# Altium PCB Main.PcbDoc (part 1 of 2)
Units mm, origin at the board's own origin, x right, y up, seen from the top; angles counter-clockwise.
Board outline 150 x 140 mm, 2 copper layers (Top Layer, Bottom Layer); 87 components, 111 nets, 391 pads, 43 vias.
Unrouted connection lines stored in the file: 32.
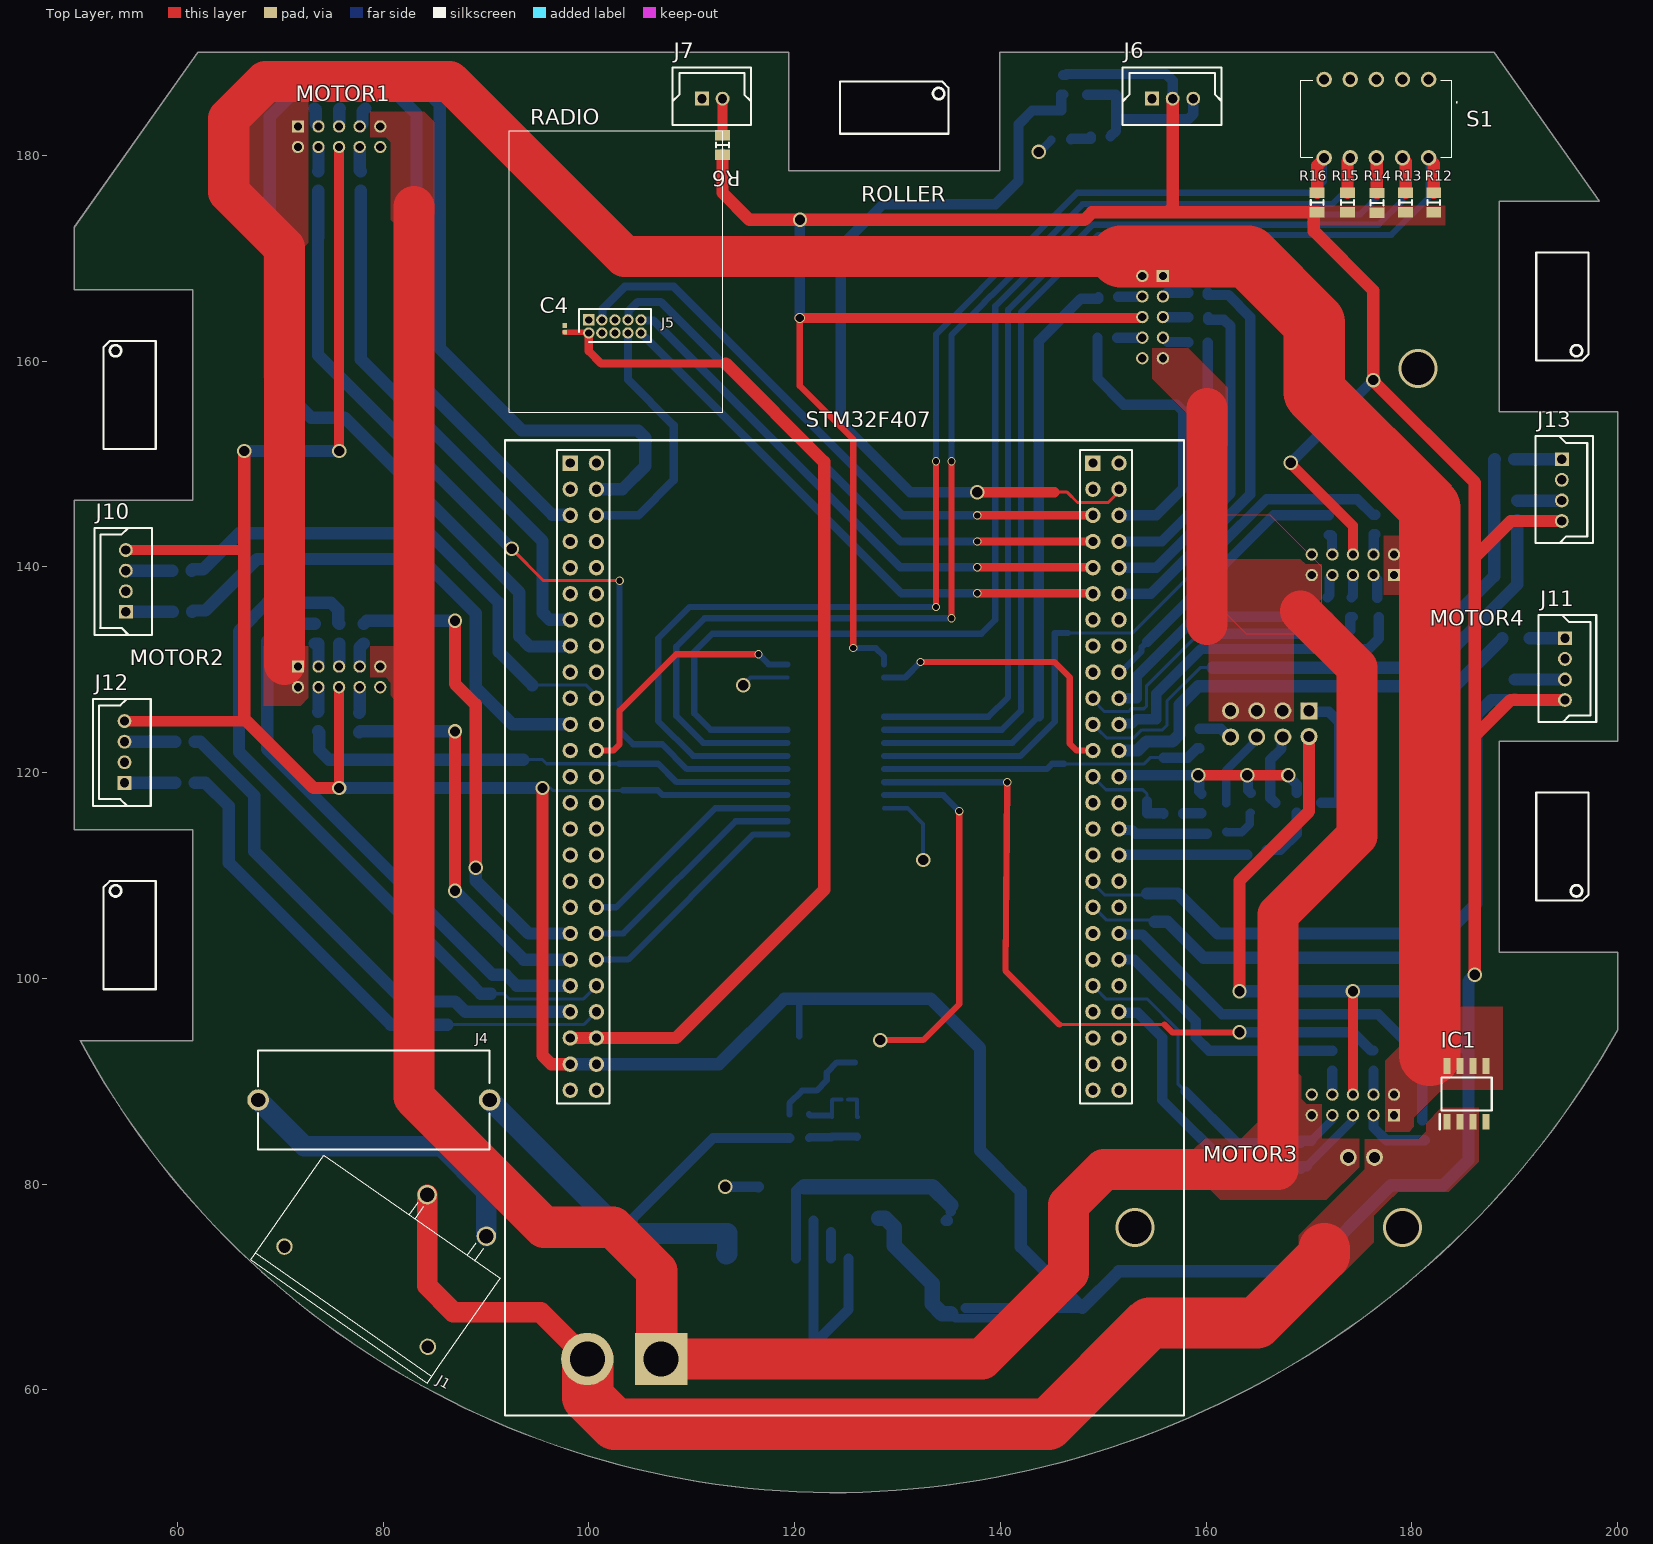
[diagram p0: Top Layer view]
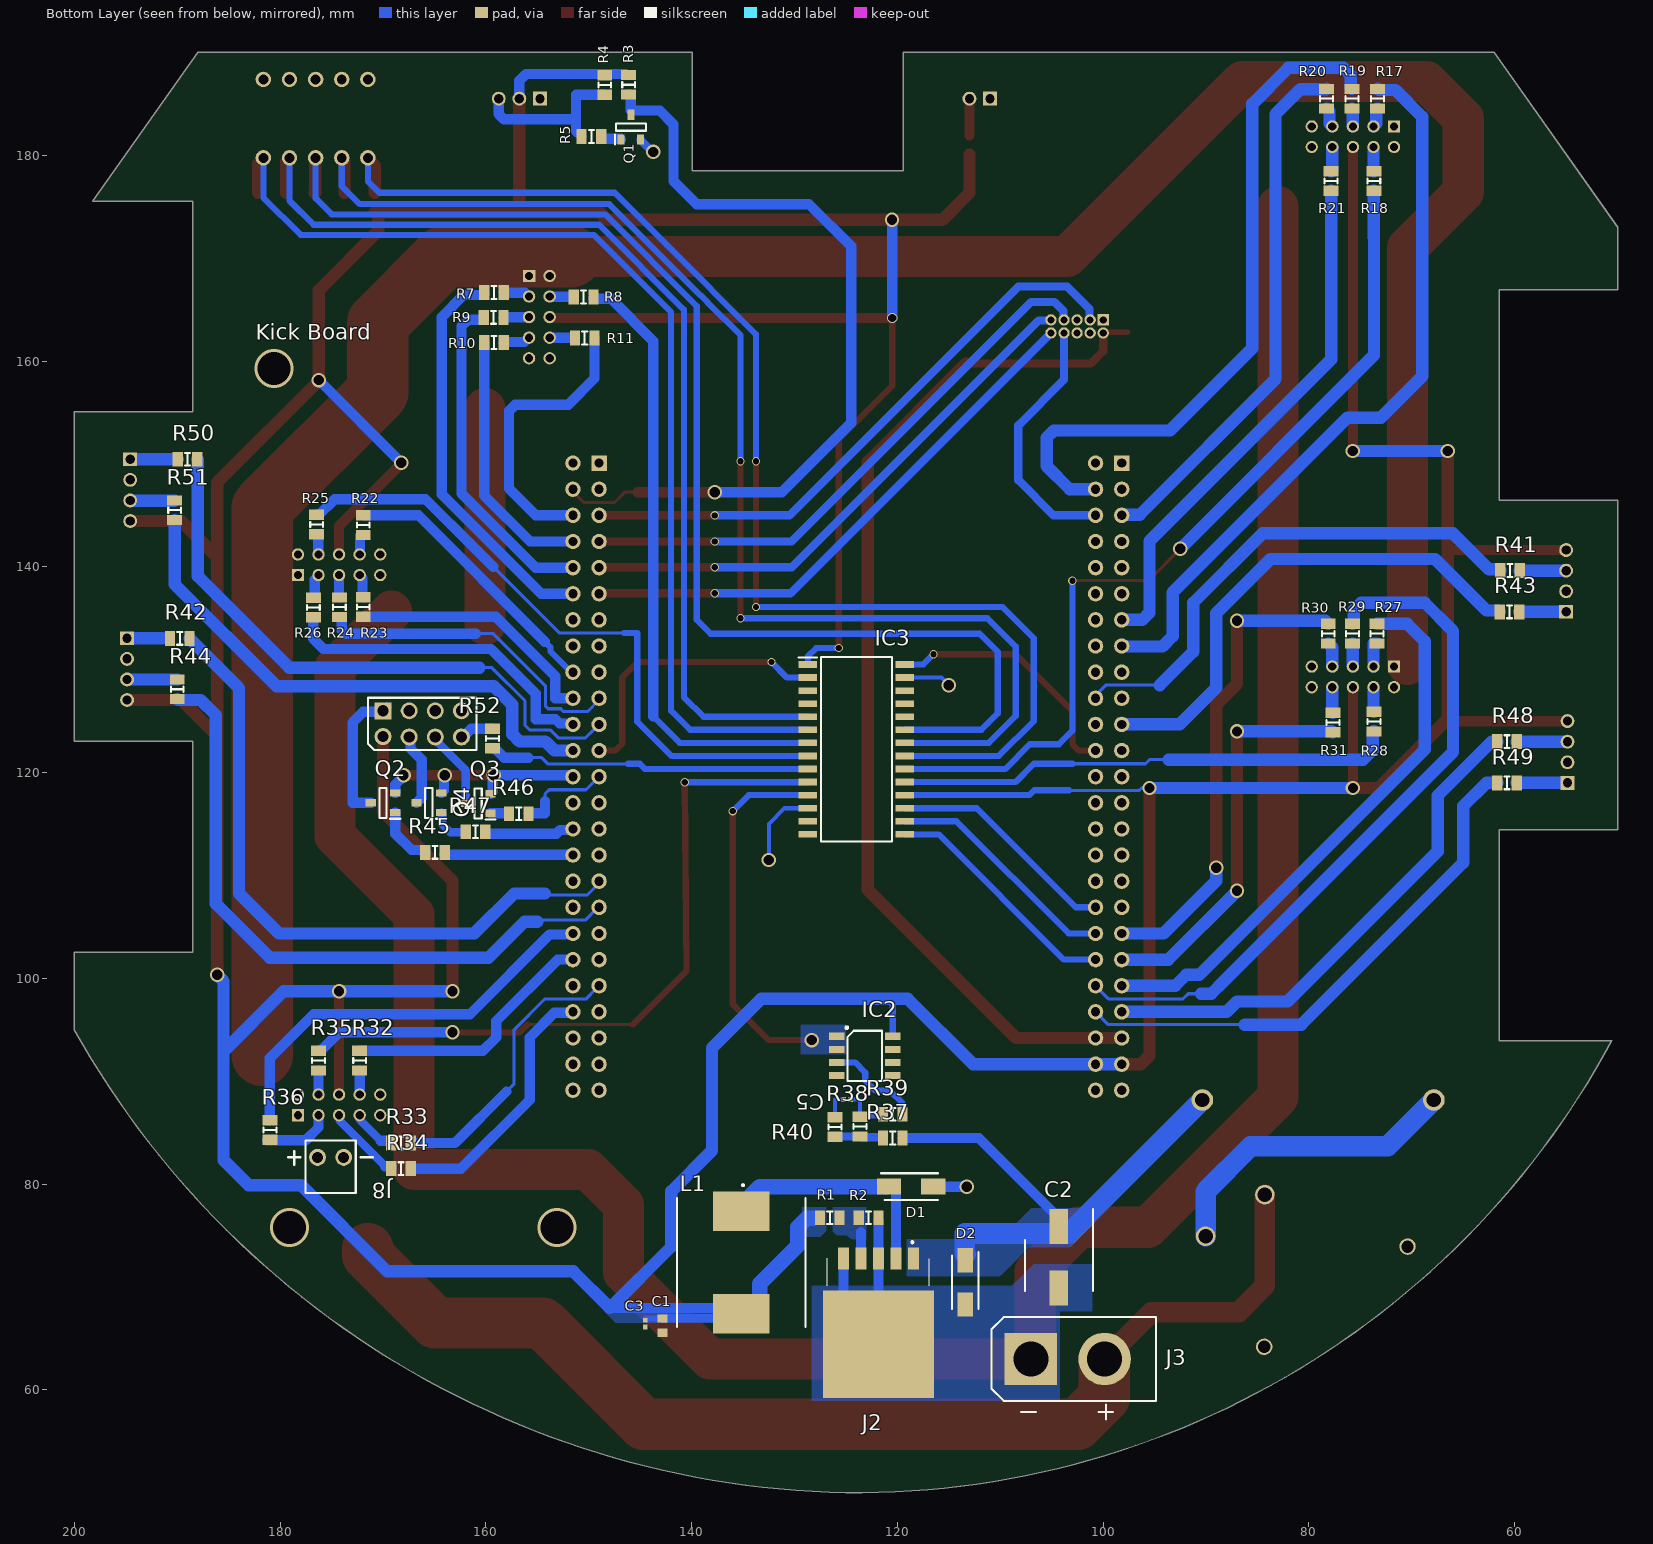
[diagram p1: Bottom Layer view, seen from below]
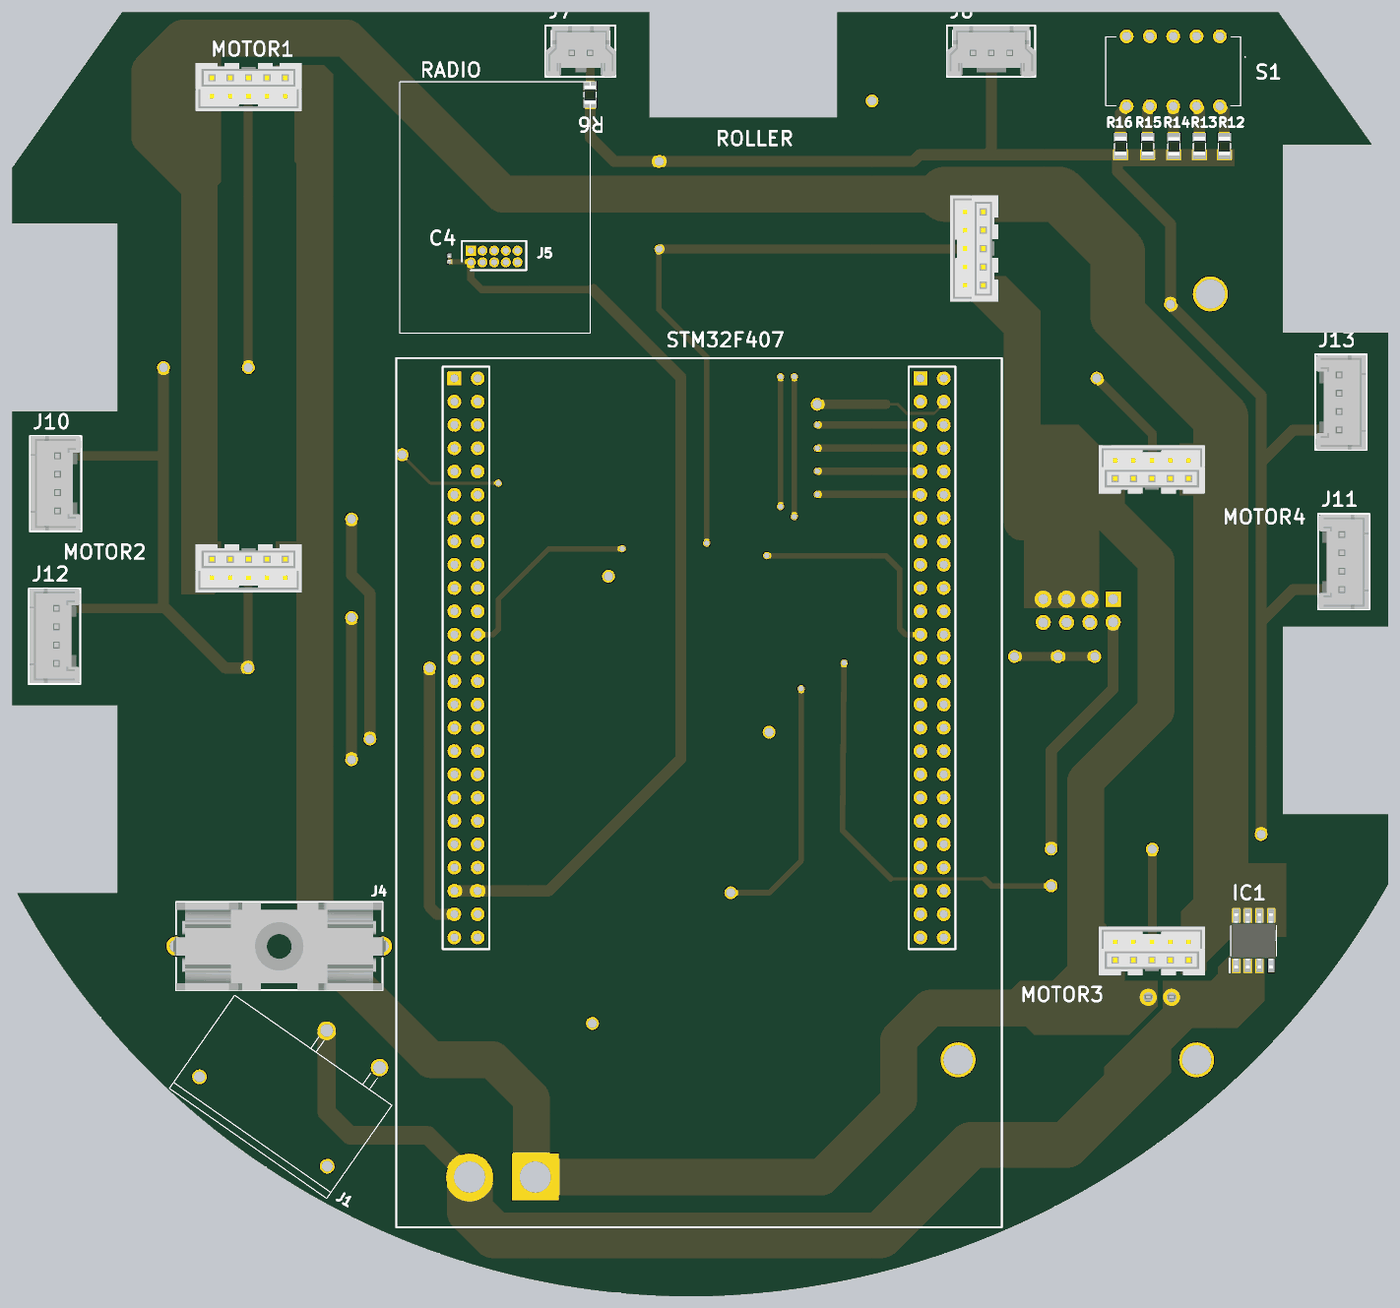
[diagram p2: 3D render of the assembled board from above, using the file's embedded part models]
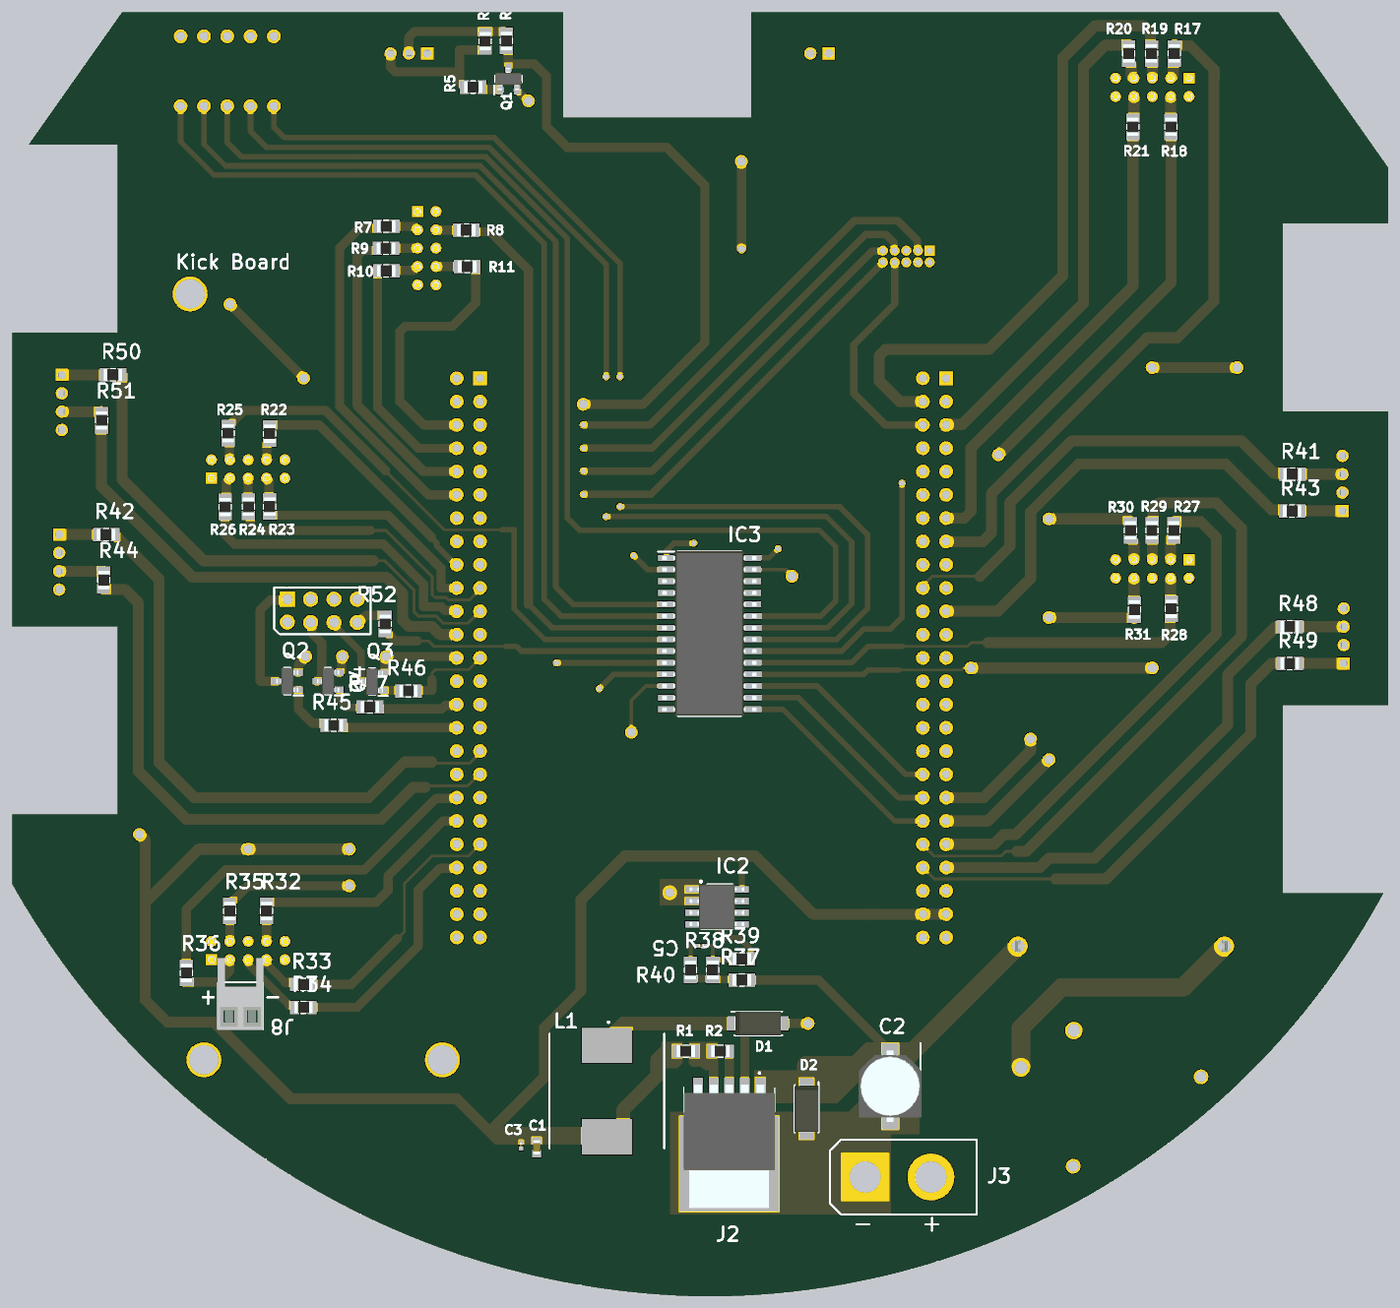
[diagram p3: 3D render of the assembled board from below, using the file's embedded part models]

## Layer stack, top to bottom
Top Solder: solder mask 0.0102, Solder Resist, Dk 3.5
Top Layer: signal copper 0.0356
Dielectric 1: dielectric 0.32, FR-4, Dk 4.8
Bottom Layer: signal copper 0.0356
Bottom Solder: solder mask 0.0102, Solder Resist, Dk 3.5

## Board outline
119.425,190 119.425,178.5 139.925,178.5 139.925,190 188,190 198.2,175.55 188.5,175.55 188.5,155.05 200,155.05 200,123.05 188.5,123.05 188.5,102.55 200,102.55 200,95 cw(c123.232,137.946) 125,50 cw(c124.167,133.611) 50.562,93.94 61.5,93.94 61.5,114.45 50,114.45 50,146.45 61.5,146.45 61.5,166.95 50,166.95 50,173 62,190

## Design rules (kind name [scope] priority, off if disabled: settings)
Clearance [All] p1: gap=0.2 ignorepadtopadclearanceinfootprint=FALSE
ComponentClearance [All] p1 off: gap=0.254 collisioncheckmode=3 verticalgap=0.254 showdistances=FALSE
DiffPairsRouting [All] p1: maxlimit=10 minlimit=0.254 mostfreqgap=0.254 toplayer_minwidth=0.381 toplayer_maxwidth=10 toplayer_prefwidth=0.381 bottomlayer_minwidth=0.381 bottomlayer_maxwidth=10 bottomlayer_prefwidth=0.381 maxuncoupledlength=12.7
Height [All] p1 off: minheight=0 maxheight=25.4 prefheight=12.7
PlaneClearance [All] p1: clearance=0.3
PlaneConnect [All] p1: planeconnectstyle=Direct reliefexpansion=2 reliefentries=2 reliefconductorwidth=2 reliefairgap=2
PolygonConnect [All] p1: connectstyle=Direct reliefconductorwidth=0.254 reliefentries=4 polygonreliefangle="90 Angle" airgapwidth=0.254
RoutingVias [All] p1: holewidth=0.711 width=1.27 viastyle="Through Hole" minholewidth=0.711 minwidth=1.27 maxholewidth=10 maxwidth=10
SolderMaskExpansion [All] p1: expansion=0.102
Width [All] p1: maxlimit=10 minlimit=0.254 preferedwidth=0.254
25 further rules are at their usual default settings.

## Components (designator, comment, footprint, x,y, rotation, side; value= is the part's Value field where it differs from the comment)
C1 "220µF Tantalum" "CAP C2 SMD 6032 (2312)" 142.825,66.25 r270 bottom
C2 "100uF 16V" "C1 CAP ALUM SMD" 104.3,72.9 r270 bottom
C3 "0,1uF" "CAP C3 0603 SMD" 144.525,66.435 r270 bottom
C4 "0,1uF" "CAP C3 0603 SMD" 97.65,163.125 r270 top
C5 "0,1uF" "CAP C3 0603 SMD" 124.887,88.223 r0 bottom
D1 "B340A-13-F" "Diodo D1, D2" 118.675,79.75 r180 bottom
D2 "ES1G" "Diodo D1, D2" 113.411,70.45 r270 bottom
IC1 "IRF9310TRPBF" "Mosfet P_VCC" 185.315,88.762 r90 top
IC2 "LM358AMX" "OP AMP Bateria" 123.175,92.457 r180 bottom
IC3 "DG407DYZ" "MUX 2x 8:1" 124,122.25 r180 bottom
J1 "Botão D502J12S2AHQF" "Botão Bateria Main" 84.284,78.976 r55 top
J2 "Regulador LM2596S" LM2596S50TR 121.85,68.596 r90 bottom
J3 "Conn Bateria PRT-10474" "CONN BATERIA BOLADO" 107.025,63 r180 bottom
J4 "FUSIVEL 0031.8201" "PORTA FUSIVEL" 79.114,88.175 r0 top
J5 "Radio 20021311-00010T4LF" "CONN RADIO" 100,164 r270 top locked
J6 "Sensor Bola" "Conn Receptor Infra" 154.75,185.5 r0 top
J7 "Sensor Bola" "CONN EMISOR INFRA" 111,185.5 r0 top
J8 "Kick 23-0009483026-ND" "BATTERY MAIN TO KICK CONNECTOR" 175.095,85.65 r180 bottom locked
J10 "Encoder" "Conn Encoder" 55,135.625 r90 top
J11 "Encoder" "Conn Encoder" 194.875,133.05 r270 top
J12 "Encoder" "Conn Encoder" 54.875,119 r90 top
J13 "Encoder" "Conn Encoder" 194.575,150.45 r270 top
"Kick Board" "CONN MAIN 2.54mm" "KICK BOARD" 170,126 r180 bottom locked
L1 "33uH" "Indutor DR124-330-R" 135.175,72.375 r270 bottom
MOTOR1 "BLOCO MOTOR Final" "BLOCOMOTOR FINAL" 54,161 r270 top locked
MOTOR2 "BLOCO MOTOR Final" "BLOCOMOTOR FINAL" 54,108.5 r270 top locked
MOTOR3 "BLOCO MOTOR Final" "BLOCOMOTOR FINAL" 196,108.5 r90 top locked
MOTOR4 "BLOCO MOTOR Final" "BLOCOMOTOR FINAL" 196,161 r90 top locked
Q1 "MMBT3904" "Mini Transistor" 145.911,182.73 r90 bottom
Q2 "MMBT3904" "Mini Transistor" 170,117.06 r0 bottom
Q3 "MMBT3904" "Mini Transistor" 160.754,117 r0 bottom
Q4 "MMBT3904" "Mini Transistor" 165.55,117.06 r0 bottom
R1 "4k7" "RES 0805" 126.575,76.725 r0 bottom
R2 "1k5" "RES 0805" 122.8,76.725 r0 bottom
R3 "470R" "RES 0805" 146.125,186.855 r270 bottom
R4 "4K7" "RES 0805" 148.45,186.83 r270 bottom
R5 "10K" "RES 0805" 149.75,181.83 r0 bottom
R6 "Dimensionar!!!!" "RES 0805" 113,181 r270 top
R7 "1K" "RES 0805" 159.225,166.65 r180 bottom
R8 "1K" "RES 0805" 150.5,166.225 r0 bottom
R9 "1K" "RES 0805" 159.25,164.25 r180 bottom
R10 "1K" "RES 0805" 159.225,161.8 r180 bottom
R11 "1K" "RES 0805" 150.4,162.25 r0 bottom
R12 "4K7" "RES 0805" 182.125,175.4 r90 top
R13 "4K7" "RES 0805" 179.4,175.4 r90 top
R14 "4K7" "RES 0805" 176.625,175.375 r90 top
R15 "4K7" "RES 0805" 173.75,175.4 r90 top
R16 "4K7" "RES 0805" 170.8,175.4 r90 top
R17 "1K" "RES 0805" 73.325,185.5 r270 bottom
R18 "1K" "RES 0805" 73.7,177.5 r90 bottom
R19 "1K" "RES 0805" 75.825,185.5 r270 bottom
R20 "1K" "RES 0805" 78.3,185.5 r270 bottom
R21 "1K" "RES 0805" 77.85,177.5 r90 bottom
R22 "1K" "RES 0805" 171.925,144.05 r270 bottom
R23 "1K" "RES 0805" 171.925,136.1 r90 bottom
R24 "1K" "RES 0805" 174.25,136.075 r90 bottom
R25 "1K" "RES 0805" 176.45,144.1 r270 bottom
R26 "1K" "RES 0805" 176.775,136.05 r90 bottom
R27 "1K" "RES 0805" 73.375,133.5 r270 bottom
R28 "1K" "RES 0805" 73.675,124.95 r90 bottom
R29 "1K" "RES 0805" 75.775,133.5 r270 bottom
R30 "1K" "RES 0805" 78.125,133.5 r270 bottom
R31 "1K" "RES 0805" 77.675,124.875 r90 bottom
R32 "1K" "RES 0805" 172.27,92 r270 bottom
R33 "1K" "RES 0805" 168.25,84 r0 bottom
R34 "1K" "RES 0805" 168.25,81.5 r0 bottom
R35 "1K" "RES 0805" 176.275,92 r270 bottom
R36 "1K" "RES 0805" 181,85.25 r270 bottom
R37 "10k" "RES 0805" 120.463,84.481 r180 bottom
R38 "4k7" "RES 0805" 123.637,85.585 r270 bottom
R39 "4k7" "RES 0805" 120.452,86.785 r0 bottom
R40 "1k" "RES 0805" 126.057,85.56 r270 bottom
R41 "300R" "RES 0805" 60.45,139.625 r180 bottom
R42 "300R" "RES 0805" 189.75,133.05 r180 bottom
R43 "300R" "RES 0805" 60.5,135.625 r180 bottom
R44 "300R" "RES 0805" 190,128.1 r270 bottom
R45 "4K7" "RES 0805" 164.95,112.25 r180 bottom
R46 "4K7" "RES 0805" 156.8,116 r180 bottom
R47 "4K7" "RES 0805" 161,114.25 r180 bottom
R48 "300R" "RES 0805" 60.75,123 r180 bottom
R49 "300R" "RES 0805" 60.75,119 r180 bottom
R50 "300R" "RES 0805" 189,150.45 r180 bottom
R51 "300R" "RES 0805" 190.25,145.5 r270 bottom
R52 "1K" "RES 0805" 159.35,123.3 r270 bottom
ROLLER "BLOCO MOTOR Final" "BLOCOMOTOR FINAL" 134,186 r180 top locked
S1 "Dip Switch SPST 5 Position" "Dip Switch SPST 5 Position" 181.63,187.37 r180 top
STM32F407 "STM32F407 DISC" "STM32F407 DISC" 151.54,150.08 r180 top locked

## Footprints (in the part's own frame and the unit in brackets; to place one, negate y for a bottom-side part, rotate by r counter-clockwise, add the part's x,y. Pads: shape width x height; smd on the part's side, far side on the other; paste and mask are expansions set on the pad)
"BATTERY MAIN TO KICK CONNECTOR" [mm] "Da Main até a kick"
  round 1.65 hole 1.07: 1(1.27,-3.05) 2(-1.27,-3.05)
  silkscreen extent -4.09,-6.53 4.09,-1.43, body extent -2.49,-6.6 2.49,1.2, height 8
"BLOCOMOTOR FINAL" [mm]
  rect 1.2x1.2 hole 0.8: 1(-21.802,17.73)
  round 1.2 hole 0.8: 2(-19.802,17.73) 3(-21.802,19.73) 4(-19.802,19.73) 5(-21.802,21.73) 6(-19.802,21.73) 7(-21.802,23.73) 8(-19.802,23.73) 9(-21.802,25.73) 10(-19.802,25.73)
  silkscreen extent -0.95,-1.17 9.56,3.91, body extent -23.49,15.99 -18.21,27.56, height 6.35
"Botão Bateria Main" [mm]
  round 1.9 hole 1.4: 1(0,0) 2(0,-7.04)
  round 1.6 hole 1.2: 3(-12.09,8.46) 3(-12.08,-8.54)
  silkscreen extent -15,-10.5 -1.1,10.42
"C1 CAP ALUM SMD" [mm] "cap um pouco menor"
  rect 3.4x1.8 smd: 1(-3,0) 2(3,0)
  silkscreen extent -4.7,-3.3 3.3,3.3, body extent -3.9,-3.4 3.9,3.4, height 6.1
"CAP C2 SMD 6032 (2312)" [mm] "Package 2312 (6032 Metric)"
  rect 0.78x0.99 smd: 1(-0.7,0) 2(0.7,0)
  body extent -0.8,-0.4 0.8,0.41, height 0.9
"CAP C3 0603 SMD" [mm] "Package 0603 (1608 Metric)"
  rect 0.47x0.44 smd: 1(-0.335,0) 2(0.335,0)
  body extent -0.3,-0.15 0.3,0.15, height 0.33
"CONN BATERIA BOLADO" [mm] "Conn que ja vem com a bateria"
  rect 5.1x5.1 hole 3.4: 1(0,0)
  round 5.1 hole 3.4: 2(7.163,0)
  silkscreen extent -3.83,-5.86 12.15,4.06
"CONN EMISOR INFRA" [mm] "CONN HEADER VERT 2POS 2MM"
  rect 1.35x1.35 hole 0.9: 1(0,0)
  round 1.35 hole 0.9: 2(2,0)
  silkscreen extent -2.88,-2.55 4.75,3.05, body extent -2.85,-2.55 4.85,3, height 8.55
"Conn Encoder" [mm] "CONN HEADER VERT 4POS 2MM"
  rect 1.35x1.35 hole 0.9: 1(0,0)
  round 1.35 hole 0.9: 2(2,0) 3(4,0) 4(6,0)
  silkscreen extent -2.25,-2.55 8.15,3.05, body extent -2.15,-2.55 8.15,3, height 8.55
"CONN RADIO" [mm] "CONN RCPT 1.27 mm 10POS 0.05 GOLD PCB"
  rect 1.1x1.1 hole 0.7: 1(0,0)
  round 1.1 hole 0.7: 2(1.27,0) 3(0,1.27) 4(1.27,1.27) 5(0,2.54) 6(1.27,2.54) 7(0,3.81) 8(1.27,3.81) 9(0,5.08) 10(1.27,5.08)
  silkscreen extent -18.4,-7.75 9,13
"Conn Receptor Infra" [mm] "CONN HEADER VERT 3POS 2MM"
  rect 1.35x1.35 hole 0.9: 1(0,0)
  round 1.35 hole 0.9: 2(2,0) 3(4,0)
  silkscreen extent -2.88,-2.55 6.75,3.05, body extent -2.87,-2.55 6.83,3, height 8.55
"Diodo D1, D2" [mm] "Package DO-214AC, SMA"
  rect 2.35x1.55 smd: 1(-2.15,0) 2(2.15,0)
  silkscreen extent -2.93,-1.3 2.6,1.3, body extent -2.6,-1.3 2.6,1.3, height 2.4
"Dip Switch SPST 5 Position" [mil]
  round 59.09 hole 38: 1(0,0) 2(100,0) 3(200,0) 4(300,0) 5(400,0) 6(0,300) 7(100,300) 8(200,300) 9(300,300) 10(400,300)
  silkscreen extent -110,2 490,298
"Indutor DR124-330-R" [mm] "33uH"
  rect 3.85x5.5 smd: 1(-4.975,0) 2(4.975,0)
  silkscreen extent -7.61,-6.25 6.25,6.25
"KICK BOARD" [mm]
  rect 1.65x1.65 hole 1.1: 1(0,0)
  round 1.65 hole 1.1: 2(0,-2.5) 3(2.54,0) 4(2.54,-2.54) 5(5.08,0) 6(5.08,-2.54) 7(7.62,0) 8(7.62,-2.54)
  silkscreen extent -1.45,-3.81 9.07,1.27
LM2596S50TR [mm]
  rect 2.16x1.07 smd: 1(4.162,-3.4) 2(4.162,-1.7) 3(4.162,0) 4(4.162,1.7) 5(4.162,3.4)
  rect 10.41x10.8 smd: 6(-4.162,0)
  silkscreen extent 1.5,-4.95 5.8,4.95, body extent -8.96,-4.95 4.5,4.96, height 4.75
"Mini Transistor" [mm] "MMBT3904"
  rect 1x0.7 smd: 1(-1.2,0.95) 2(-1.2,-0.95) 3(1.2,0)
  silkscreen extent -1.7,-1.46 0.35,1.55, body extent -1.2,-1.46 1.2,1.46, height 0.93
"Mosfet P_VCC" [mm] "MOSFET P-CH 30V 20A 8-SOIC"
  rect 1.525x0.7 smd: 1(-2.712,1.905) 2(-2.712,0.635) 3(-2.712,-0.635) 4(-2.712,-1.905) 5(2.712,-1.905) 6(2.712,-0.635) 7(2.712,0.635) 8(2.712,1.905)
  silkscreen extent -3.47,-2.45 1.6,2.61, body extent -3,-2.45 3,2.45, height 1.75
"MUX 2x 8:1" [mm] "DG407DYZ"
  rect 1.8x0.65 smd: 1(-4.7,8.255) 2(-4.7,6.985) 3(-4.7,5.715) 4(-4.7,4.445) 5(-4.7,3.175) 6(-4.7,1.905) 7(-4.7,0.635) 8(-4.7,-0.635) 9(-4.7,-1.905) 10(-4.7,-3.175) 11(-4.7,-4.445) 12(-4.7,-5.715) 13(-4.7,-6.985) 14(-4.7,-8.255) 15(4.7,-8.255) 16(4.7,-6.985) 17(4.7,-5.715) 18(4.7,-4.445) 19(4.7,-3.175) 20(4.7,-1.905) 21(4.7,-0.635) 22(4.7,0.635) 23(4.7,1.905) 24(4.7,3.175) 25(4.7,4.445) 26(4.7,5.715) 27(4.7,6.985) 28(4.7,8.255)
  silkscreen extent -5.6,-8.97 3.45,8.97, body extent -5.14,-8.97 5.14,8.97, height 2.64
"OP AMP Bateria" [mm] "Medir nivel da bateria"
  rect 1.525x0.7 smd: 1(-2.712,1.905) 2(-2.712,0.635) 3(-2.712,-0.635) 4(-2.712,-1.905) 5(2.712,-1.905) 6(2.712,-0.635) 7(2.712,0.635) 8(2.712,1.905)
  silkscreen extent -1.85,-2.45 1.68,2.85, body extent -3,-2.45 3,2.45, height 1.75
"PORTA FUSIVEL" [mm] "Fuse Block 10A 500V"
  round 2.1 hole 1.4: 1(-11.25,0) 2(11.25,0)
  silkscreen extent -11.25,-4.8 11.25,4.8, body extent -11.55,-4.83 11.55,4.77, height 11.5
"RES 0805" [mm] "RESC2012X65N"
  rect 1x1.45 smd: 1(-0.95,0) 2(0.95,0)
  silkscreen extent -0.25,-0.63 0.25,0.63, body extent -1,-0.63 1,0.62, height 0.65
"STM32F407 DISC" [mm]
  rect 1.5x1.5 hole 0.9: 1.1(2.54,0) 2.1(53.34,0)
  round 1.5 hole 0.9: 1.2(0,0) 1.3(2.54,2.54) 1.4(0,2.54) 1.5(2.54,5.08) 1.6(0,5.08) 1.7(2.54,7.62) 1.8(0,7.62) 1.9(2.54,10.16) 1.10(0,10.16) 1.11(2.54,12.7) 1.12(0,12.7) 1.13(2.54,15.24) 1.14(0,15.24) 1.15(2.54,17.78) 1.16(0,17.78) 1.17(2.54,20.32) 1.18(0,20.32) 1.19(2.54,22.86) 1.20(0,22.86) 1.21(2.54,25.4) 1.22(0,25.4) 1.23(2.54,27.94) 1.24(0,27.94) 1.25(2.54,30.48) 1.26(0,30.48) 1.27(2.54,33.02) 1.28(0,33.02) 1.29(2.54,35.56) 1.30(0,35.56) 1.31(2.54,38.1) 1.32(0,38.1) 1.33(2.54,40.64) 1.34(0,40.64) 1.35(2.54,43.18) 1.36(0,43.18) 1.37(2.54,45.72) 1.38(0,45.72) 1.39(2.54,48.26) 1.40(0,48.26) 1.41(2.54,50.8) 1.42(0,50.8) 1.43(2.54,53.34) 1.44(0,53.34) 1.45(2.54,55.88) 1.46(0,55.88) 1.47(2.54,58.42) 1.48(0,58.42) 1.49(2.54,60.96) 1.50(0,60.96) 2.2(50.8,0) 2.3(53.34,2.54) 2.4(50.8,2.54) 2.5(53.34,5.08) 2.6(50.8,5.08) 2.7(53.34,7.62) 2.8(50.8,7.62) 2.9(53.34,10.16) 2.10(50.8,10.16) 2.11(53.34,12.7) 2.12(50.8,12.7) 2.13(53.34,15.24) 2.14(50.8,15.24) 2.15(53.34,17.78) 2.16(50.8,17.78) 2.17(53.34,20.32) 2.18(50.8,20.32) 2.19(53.34,22.86) 2.20(50.8,22.86) 2.21(53.34,25.4) 2.22(50.8,25.4) 2.23(53.34,27.94) 2.24(50.8,27.94) 2.25(53.34,30.48) 2.26(50.8,30.48) 2.27(53.34,33.02) 2.28(50.8,33.02) 2.29(53.34,35.56) 2.30(50.8,35.56) 2.31(53.34,38.1) 2.32(50.8,38.1) 2.33(53.34,40.64) 2.34(50.8,40.64) 2.35(53.34,43.18) 2.36(50.8,43.18) 2.37(53.34,45.72) 2.38(50.8,45.72) 2.39(53.34,48.26) 2.40(50.8,48.26) 2.41(53.34,50.8) 2.42(50.8,50.8) 2.43(53.34,53.34) 2.44(50.8,53.34) 2.45(53.34,55.88) 2.46(50.8,55.88) 2.47(53.34,58.42) 2.48(50.8,58.42) 2.49(53.34,60.96) 2.50(50.8,60.96)
  silkscreen extent -6.33,-2.22 59.67,92.56

## Part data
C1: library part "CAP C2 Tantalum", "220µF Molded Tantalum Capacitors 6.3V 2312 (6032 Metric) 125mOhm /  / TPSC227M006R0125 /  / 478-5239-1-ND", Manufacturer_Name=Panasonic, Manufacturer_Part_Number=EEE-FK1E101P, Mouser Part Number=667-EEE-FK1E101P, Allied_Number=70258245, Allied Price/Stock=https://www.alliedelec.com/panasonic-eee-fk1e101p/70258245/, Datasheet Link=https://industrial.panasonic.com/cdbs/www-data/pdf/RDE0000/ABA0000C1181.pdf, Height=6.5mm, Mouser Price/Stock=https://www.mouser.com/Search/Refine.aspx?Keyword=667-EEE-FK1E101P
C2: library part "C1 CAP ALUM 16V EEE-1CA101WP", "100µF 16V Aluminum Electrolytic Capacitors Radial, Can - SMD  1000 Hrs @ 85°C /  / PCE3880CT-ND /  /  EEE-1CA101WP", Manufacturer_Name=Panasonic, Manufacturer_Part_Number=EEE-1CA101WP, Mouser Part Number=667-EEE-1CA101WP, RS Part Number=8077884, Allied_Number=70257932, Allied Price/Stock=https://www.alliedelec.com/panasonic-eee-1ca101wp/70257932/, Datasheet Link=https://industrial.panasonic.com/cdbs/www-data/pdf/RDE0000/ABA0000C1145.pdf, Height=6.1mm, Mouser Price/Stock=https://www.mouser.com/Search/Refine.aspx?Keyword=667-EEE-1CA101WP, RS Price/Stock=https://uk.rs-online.com/web/p/products/8077884
C3 C4 C5: library part "CAP C3 0603", "0.1µF -20%, +80% 50V Ceramic Capacitor Y5V (F) 0603 (1608 Metric) /  / C1608Y5V1H104Z /  / 445-1324-1-ND", Manufacturer_Name=TDK, Manufacturer_Part_Number=C3216C0G1H103J060AA, Mouser Part Number=810-C3216C0G1H103J-1, RS Part Number=7407467P, Datasheet Link=https://product.tdk.com/info/en/catalog/datasheets/mlcc_commercial_midvoltage_en.pdf, Height=0.75mm, Mouser Price/Stock=https://www.mouser.com/Search/Refine.aspx?Keyword=810-C3216C0G1H103J-1, RS Price/Stock=http://uk.rs-online.com/web/p/products/7407467P
D1: library part "Diodo D2 B340A-13-F", "Diode Schottky 40V 3A Surface Mount SMA /  / B340A-FDITR-ND /  / B340A-13-F", Manufacturer_Name="Diodes Inc.", Manufacturer_Part_Number=ES1G, Mouser Part Number=N/A, Datasheet Link=https://www.diodes.com/assets/Datasheets/ds14001.pdf, Height=2.4mm, Mouser Price/Stock=https://www.mouser.com/Search/ProductDetail.aspx?qs=T8kGKSMx1V6viEjwVgaU9A%3d%3d
D2: library part "Diodo D1 ES1G", "Diode Standard 400V 1A Surface Mount SMA (DO-214AC) /  / S1GFSCT-ND", Manufacturer_Name="Diodes Inc.", Mouser Part Number=N/A, Datasheet Link=https://www.diodes.com/assets/Datasheets/ds14001.pdf, Height=2.4mm, Manufacturer_Part_Number=ES1G, Mouser Price/Stock=https://www.mouser.com/Search/ProductDetail.aspx?qs=T8kGKSMx1V6viEjwVgaU9A%3d%3d
IC1: library part "Mosfet P_VCC", "MOSFET P-CH 30V 20A 8-SOIC /  / P-Channel 30V 20A (Tc) 2.5W (Ta) Surface Mount 8-SO /  / IRF9310TRPBF /  / IRF9310TRPBFTR-ND", Manufacturer_Name=Infineon, Manufacturer_Part_Number=IRF9310PBF, Mouser Part Number=942-IRF9310PBF, RS Part Number=7259234P, Allied_Number=70019233, Allied Price/Stock=https://www.alliedelec.com/infineon-irf9310pbf/70019233/, Datasheet Link=http://www.farnell.com/datasheets/2040382.pdf, Height=1.75mm, Mouser Price/Stock=https://www.mouser.com/Search/Refine.aspx?Keyword=942-IRF9310PBF, RS Price/Stock=http://uk.rs-online.com/web/p/products/7259234P
IC2: library part "OP AMP Bateria", "IC OPAMP GP 2 CIRCUIT 8SOIC /  / General Purpose Amplifier 2 Circuit  8-SOIC /  / LM358AMXFSCT-ND /  / LM358AMX", Manufacturer_Name="ON Semiconductor", Mouser Part Number=512-LM358AMX, RS Part Number=7599399P, Datasheet Link=http://docs-emea.rs-online.com/webdocs/10c0/0900766b810c0a50.pdf, Height=1.75mm, Manufacturer_Part_Number=LM358AMX, Mouser Price/Stock=https://www.mouser.com/Search/Refine.aspx?Keyword=512-LM358AMX, RS Price/Stock=http://uk.rs-online.com/web/p/products/7599399P
IC3: library part "MUX 2x 8:1", "IC MULTIPLEXER DUAL 8X1 28SOIC /  / 2 Circuit IC Switch 8:1 100Ohm 28-SOIC /  / DG407DYZ", Manufacturer_Name=Intersil, Mouser Part Number=968-DG407DYZ, Manufacturer_Part_Number=DG407DYZ, Mouser Price/Stock=http://www.mouser.com/Search/ProductDetail.aspx?qs=cbl4%252bYHJGOHwHxaVU1fONg%3d%3d
J1: library part "Botão Bateria Main", "Rocker Switch SPST 10A (AC) 125V Panel Mount, Snap-In, Right Angle /  / D502J12S2AHQF /  / CKN2058-ND", Manufacturer_Name=SCHURTER, Manufacturer_Part_Number=0031.8201, Mouser Part Number=693-0031.8201, RS Part Number=2508764386, Datasheet Link=http://www.schurter.com.hk/var/schurter/storage/ilcatalogue/files/document/datasheet/en/pdf/typ_OGN.pdf, Mouser Price/Stock=https://www.mouser.com/Search/Refine.aspx?Keyword=693-0031.8201, RS Price/Stock=http://uk.rs-online.com/web/p/products/2508764386
J2: library part "Regulador LM2596S 12V - 5V", "Buck Switching Regulator IC Positive Adjustable 1.2V 1 Output 3A TO-263-6, D²Pak (5 Leads + Tab), TO-263BA /  / LM2596S-ADJ", Manufacturer_Name="National Electronics", Manufacturer_Part_Number=LM2596S-5.0/TR, Datasheet Link=https://www.jameco.com/Jameco/Products/ProdDS/895246.pdf, Height=4.65mm
J3: library part "Conn Bateria Bolado", "XT60 CONNECTORS MALE /  / PRT-10474 /  / 1568-1816-ND", Manufacturer_Name=SparkFun, Manufacturer_Part_Number=PRT-10474, Mouser Part Number=474-PRT-10474, Datasheet Link=http://cdn.sparkfun.com/datasheets/Prototyping/xt60.pdf, Height=15.875mm, Mouser Price/Stock=https://www.mouser.com/Search/Refine.aspx?Keyword=474-PRT-10474
J4: library part "PORTA FUSIVEL 0031.8201", "Fuse Block 10A 500V 1 Circuit Cartridge Through Hole /  / 486-1258-ND /  / 0031.8201", Manufacturer_Name=SCHURTER, Manufacturer_Part_Number=0031.8201, Mouser Part Number=693-0031.8201, RS Part Number=2508764386, Datasheet Link=http://www.schurter.com.hk/var/schurter/storage/ilcatalogue/files/document/datasheet/en/pdf/typ_OGN.pdf, Mouser Price/Stock=https://www.mouser.com/Search/Refine.aspx?Keyword=693-0031.8201, RS Price/Stock=http://uk.rs-online.com/web/p/products/2508764386
J5: library part "CONN RADIO", "CONN RCPT 1.27mm 10POS 0.05 GOLD PCB /  / 20021311-00010T4LF /  / 609-3754-ND", Manufacturer_Name=FCI, Manufacturer_Part_Number=20021311-00010T4LF, Mouser Part Number=649-221311-00010T4LF, Datasheet Link=http://portal.fciconnect.com/Comergent//fci/drawing/20021311.pdf, Height=4.6mm, Mouser Price/Stock=https://www.mouser.com/Search/Refine.aspx?Keyword=649-221311-00010T4LF
J6: library part "Conn Receptor Infra", "Connector Header Through Hole 3 position 0.079\" (2.00mm) /  / CONN HEADER VERT 3POS 2MM /  / 0353620350 /  / WM18921-ND", Manufacturer_Name="TE Connectivity", Manufacturer_Part_Number=292161-3, Mouser Part Number=571-292161-3, RS Part Number=6801610, Allied_Number=70083930, Allied Price/Stock=https://www.alliedelec.com/te-connectivity-292161-3/70083930/, Datasheet Link=http://www.te.com/commerce/DocumentDelivery/DDEController?Action=showdoc&DocId=Customer+Drawing%7F292161%7FP1%7Fpdf%7FEnglish%7FENG_CD_292161_P1.pdf%7F292161-3, Height=6.8mm, Mouser Price/Stock=https://www.mouser.com/Search/Refine.aspx?Keyword=571-292161-3, RS Price/Stock=https://uk.rs-online.com/web/p/products/6801610
J7: library part "Conn Emissor Infra", "Connector Header Through Hole 2 position 0.079\" (2.00mm) /  / CONN HEADER VERT 3POS 2MM /  / 0353620350 /  / WM18921-ND", Manufacturer_Name="TE Connectivity", Manufacturer_Part_Number=292161-3, Mouser Part Number=571-292161-3, RS Part Number=6801610, Allied_Number=70083930, Allied Price/Stock=https://www.alliedelec.com/te-connectivity-292161-3/70083930/, Datasheet Link=http://www.te.com/commerce/DocumentDelivery/DDEController?Action=showdoc&DocId=Customer+Drawing%7F292161%7FP1%7Fpdf%7FEnglish%7FENG_CD_292161_P1.pdf%7F292161-3, Height=6.8mm, Mouser Price/Stock=https://www.mouser.com/Search/Refine.aspx?Keyword=571-292161-3, RS Price/Stock=https://uk.rs-online.com/web/p/products/6801610
J8: library part "Battery Main to Kick", "23-0009483026-ND", Manufacturer_Name=Molex, Manufacturer_Part_Number=22-05-3021, Mouser Part Number=538-22-05-3021, RS Part Number=6795448, Allied_Number=70190620, Allied Price/Stock=https://www.alliedelec.com/molex-incorporated-22-05-3021/70190620/, Datasheet Link=http://www.molex.com/webdocs/datasheets/pdf/en-us/0022053031_PCB_HEADERS.pdf, Mouser Price/Stock=https://www.mouser.com/Search/Refine.aspx?Keyword=538-22-05-3021, RS Price/Stock=https://uk.rs-online.com/web/p/products/6795448, System=Connector
J10 J11 J12 J13: library part "Conn Encoder", "Connector Header Through Hole 4 position 0.079\" (2.00mm) /  / CONN HEADER VERT 3POS 2MM /  / 0353620350 /  / WM18921-ND", Manufacturer_Name="TE Connectivity", Manufacturer_Part_Number=292161-3, Mouser Part Number=571-292161-3, RS Part Number=6801610, Allied_Number=70083930, Allied Price/Stock=https://www.alliedelec.com/te-connectivity-292161-3/70083930/, Datasheet Link=http://www.te.com/commerce/DocumentDelivery/DDEController?Action=showdoc&DocId=Customer+Drawing%7F292161%7FP1%7Fpdf%7FEnglish%7FENG_CD_292161_P1.pdf%7F292161-3, Height=6.8mm, Mouser Price/Stock=https://www.mouser.com/Search/Refine.aspx?Keyword=571-292161-3, RS Price/Stock=https://uk.rs-online.com/web/p/products/6801610
"Kick Board": library part "Kick Board", "Connector /  / CONN HEADER VERT 8POS 2.54MM /  / M20-9980445 /  / 952-2122-ND", Manufacturer_Name=FCI, Manufacturer_Part_Number=20021311-00010T4LF, Mouser Part Number=649-221311-00010T4LF, Datasheet Link=http://portal.fciconnect.com/Comergent//fci/drawing/20021311.pdf, Height=4.6mm, Mouser Price/Stock=https://www.mouser.com/Search/Refine.aspx?Keyword=649-221311-00010T4LF, System=Connector
L1: library part "Indutor DR124-221-R", "33µH Shielded Wirewound Inductor 2.6A 97mOhm Max Nonstandard /  / DR124-330-R /  / 513-1435-1-ND", Manufacturer_Name="Cooper Bussmann", Manufacturer_Part_Number=DR124-221-R, RS Part Number=7700915, Datasheet Link=http://www.cooperindustries.com/content/dam/public/bussmann/Electronics/Resources/product-datasheets/Bus_Elx_DS_PM-4141_DR124.pdf, RS Price/Stock=https://uk.rs-online.com/web/p/products/7700915
Q1 Q2 Q3 Q4: library part Mini_Transistor, "Bipolar (BJT) Transistor NPN 40V 200mA 300MHz 350mW Surface Mount SOT-23-3 /  / MMBT3904 /  / MMBT3904FSCT-ND", Manufacturer_Name="ON Semiconductor", Mouser Part Number=512-MMBT3904, RS Part Number=7390303P, Datasheet Link=https://www.fairchildsemi.com/datasheets/MM/MMBT3904.pdf, Height=0.93mm, Manufacturer_Part_Number=MMBT3904, Mouser Price/Stock=https://www.mouser.com/Search/Refine.aspx?Keyword=512-MMBT3904, RS Price/Stock=http://uk.rs-online.com/web/p/products/7390303P
R1 R2 R3 R4 R5 R6 R7 R8 R9 R10 R11 R12 R13 R14 R15 R16 R17 R18 R19 R20 R21 R22 R23 R24 R25 R26 R27 R28 R29 R30 R31 R32 R33 R34 R35 R36 R37 R38 R39 R40 R41 R42 R43 R44 R45 R46 R47 R48 R49 R50 R51 R52: library part "Resistor 0805", "Resistor", Manufacturer_Name="TE Connectivity", Manufacturer_Part_Number=CPF0805B105RE1, Mouser Part Number=279-CPF0805B105RE1, RS Part Number=1239398, Datasheet Link=http://docs-europe.electrocomponents.com/webdocs/13d1/0900766b813d116f.pdf, Height=0.65mm, Mouser Price/Stock=https://www.mouser.com/Search/Refine.aspx?Keyword=279-CPF0805B105RE1, RS Price/Stock=http://uk.rs-online.com/web/p/products/1239398
S1: "CT2065-ND /  / 206-5 /  / Dip Switch SPST 5 Position Through Hole Slide (Standard) Actuator 50mA 24VDC", Manufacturer_Name="TE Connectivity", Manufacturer_Part_Number=1825002-9, RS Part Number=7182102P, Datasheet Link=http://uk.rs-online.com/web/p/products/7182102P, Height=4.81mm, RS Price/Stock=http://uk.rs-online.com/web/p/products/7182102P
MOTOR1 MOTOR2 MOTOR3 MOTOR4 ROLLER: System=Connector

## Via types
v1: diameter 1.4, hole 1, Top Layer to Bottom Layer, 25 vias
v2: diameter 0.8, hole 0.6, Top Layer to Bottom Layer, 14 vias
v3: diameter 3.8, hole 3.2, Top Layer to Bottom Layer, 3 vias
v4: diameter 1, hole 0.8, Top Layer to Bottom Layer, 1 vias

## Nets (pads, with @x,y where several pads share a name; then routed paths per layer and width w, separated by ;. In a path a pad name is that pad's centre, name@x,y a point inside that pad or via, vN(x,y) a via of type N, cw(c..) or ccw(c..) an arc to the next point about the centre after c; other vN are vias at no path point)
3V: C4.2 J5.2 STM32F407.2.45 STM32F407.2.46 | length 103.7
  Top Layer w0.5: C4.2 99.94,162.79 J5.2
  Top Layer w0.8: J5.2 100,160.95 101.2,159.75 113.325,159.75
  Top Layer w1.2: STM32F407.2.45 STM32F407.2.46 108.475,94.2 122.875,108.6 122.875,150.2 113.325,159.75
5V: "Kick Board.2" C1.1 C3.1 IC2.8 IC3.1 IC3.18 J6.2 J10.4 J11.4 J12.4 J13.4 L1.2 MOTOR1.6 MOTOR2.6 MOTOR3.6 MOTOR4.6 R1.2 R3.1 R4.1 R6.2 R12.1 R13.1 R14.1 R15.1 R16.1 ROLLER.6 STM32F407.1.47 STM32F407.1.48 STM32F407.2.29 STM32F407.2.47 STM32F407.2.48 | length 709.6
  Top Layer w0.6: v4(120.5,164.175) 120.5,157.575 125.7,152.375 v2(125.7,132.1)
  Top Layer w1: J12.4 66.25,125 66.5,125.25 ; J10.4 66.078,141.625 ; v1(75.73,118.5) MOTOR2.6 ; MOTOR1.6 75.73,151.27 v1(75.75,151.25) ; v4(120.5,164.175) 153.708,164.175 ROLLER.6 ; v1@120.5,173.7 v1(120.525,173.725) ; v1@168.175,150.08 174.27,143.985 MOTOR4.6 ; MOTOR3.6 v1(174.27,98.75)
  Top Layer w1.2: v1(66.5,151.25) 66.5,125.25 73.25,118.5 v1(75.73,118.5) ; v1(95.5,118.5) 95.5,92.5 96.34,91.66 STM32F407.2.47 ; R6.2 113,176.35 115.625,173.725 v1(120.525,173.725) 148.175,173.725 148.9,174.45 156.25,174.45 ; J6.2 156.75,174.95 156.25,174.45 ; v1(163.25,98.75) 163.25,109.48 170,116.23 170,123.5 ; R16.1 R16.1@170.775,174.45 ; v1@176.2,158.1 186.125,148.175 186.125,140.95 ; v1(176.25,158.15) 176.25,166.85 170.475,172.625 170.475,174.125 170.675,174.325 170.675,174.35 R16.1@170.775,174.45 ; v1(186.125,100.35) 186.125,123.575 ; J13.4 189.625,144.45 186.125,140.95 ; J11.4 189.6,127.05 186.125,123.575 ; 156.25,174.45 R16.1@170.775,174.45 ; 186.125,123.575 186.125,140.95
  Bottom Layer w0.3: v1(95.5,118.5) 96.275,118.5 96.5,118.275 103.325,118.275
  Bottom Layer w0.6: 103.325,118.275 106.7,118.275 107.17,117.805 IC3.18 ; IC2.8 120.463,98.003 ; v2(125.7,132.1) 127.9,132.1 128.7,131.3 IC3.1 ; 130.802,97.805 131,98.003 ; C1.1 C3.1@144.5,66.95
  Bottom Layer w0.8: L1.2 135.625,66.95 C1.1
  Bottom Layer w1: v4(120.5,164.175) v1@120.5,173.7 ; L1.2@136.65,67.95 147.95,67.95 ; R3.1 146.35,187.805 146.438,187.893 156.107,187.893 156.75,187.25 J6.2 ; v1@168.175,150.08 v1@176.2,158.105
  Bottom Layer w1.2: v1(66.5,151.25) v1(75.75,151.25) ; v1(75.73,118.5) v1(95.5,118.5) ; STM32F407.2.47 STM32F407.2.48 112.66,91.66 119.003,98.003 120.463,98.003 131,98.003 133.247,98.003 138.025,93.225 138.025,83.25 141.987,79.288 141.987,73.913 147.95,67.95 151.525,71.525 169.6,71.525 177.975,79.9 183.075,79.9 185.5,82.325 185.5,92.9 ; v1(163.25,98.75) v1(174.27,98.75) 179.65,98.75 185.5,92.9 ; v1(186.125,100.35) 185.5,99.725 185.5,92.9
  Bottom Layer w1.5: 128.175,76.7 128.796,76.7 129.675,75.821 129.675,74.025 133.375,70.325 133.375,68.375 134.35,67.4 L1.2
  other v1: 168.225,150.1
12V: C2.1 D2.1 J2.1 J4.2 R37.2 | length 49.8
  Bottom Layer w1: C2.1 104.3,76.7 112.081,84.481 R37.2
  Bottom Layer w2: J4.2 103.339,75.2 113.45,75.2 113.45,73.25 D2.1@113.375,73.175
A0: IC3.17 STM32F407.2.36 | length 22.6
  Bottom Layer w0.6: STM32F407.2.36 102.65,106.9 112.285,116.535 IC3.17
A1: IC3.16 STM32F407.2.38 | length 23.1
  Bottom Layer w0.6: STM32F407.2.38 103.36,104.36 114.265,115.265 IC3.16
A2: IC3.15 STM32F407.2.40 | length 23.6
  Bottom Layer w0.6: STM32F407.2.40 103.82,101.82 115.995,113.995 IC3.15
Bateria: IC2.1 IC2.2 IC3.11 | length 35.8
  Top Layer w0.6: v1(128.325,94) 132.5,94 136,97.5 v2(136,116.25)
  Bottom Layer w0.6: IC3.11 134.445,117.805 v2(136,116.25)
BRK_M1: R20.1 STM32F407.2.5 | length 52.2
  Bottom Layer w1.2: R20.1 78.325,186.425 80.825,186.425 83.25,184 83.25,158.25 96.443,145.057 98.143,145.057 STM32F407.2.5
BRK_M2: R30.1 STM32F407.2.37 | length 46.4
  Top Layer w1.2: v1(87,134.75) 87,128.625 89,126.625 v1(89,110.75)
  Bottom Layer w1.2: R30.1 78.425,134.75 v1(87,134.75) ; v1(89,110.75) 89,109.5 94.14,104.36 STM32F407.2.37
BRK_M3: R33.1 STM32F407.1.41 | length 27.7
  Bottom Layer w0.3: STM32F407.1.41 149.849,98.431 149.849,98.401 150.25,98 154.25,98 157.25,95 157.25,89.75 158,89
  Bottom Layer w1: 158,89 163,84 R33.1
BRK_M4: R23.1 STM32F407.1.20 | length 24.9
  Bottom Layer w1: STM32F407.1.20 153.25,127.22 153.25,129.375 159.025,135.15 R23.1
BRK_MR: R10.1 STM32F407.1.8 | length 25.4
  Bottom Layer w1: STM32F407.1.8 155.71,142.46 160.175,146.925 R10.1
Chip_Kick: R45.2 STM32F407.1.32 | length 12.5
  Bottom Layer w1: STM32F407.1.32 151.56,112 R45.2@164,112
DIR_M1: R19.1 STM32F407.2.4 | length 68.5
  Bottom Layer w1.2: R19.1 75.85,186.45 75.95,186.55 75.95,187.797 76.653,188.5 82,188.5 85.5,185 85.5,161.25 93.5,153.25 104.797,153.25 105.5,152.547 105.5,149.79 103.25,147.54 STM32F407.2.4
DIR_M2: R29.1 STM32F407.2.42 | length 69.5
  Bottom Layer w0.3: 90.5,98.5 91.75,98.5 92.25,98 99.5,98 100.74,99.24 STM32F407.2.42
  Bottom Layer w1.2: R29.1 75.75,134.45 75.65,134.55 75.65,135.797 74.947,136.5 68.75,136.5 66,133.75 66,122 88.25,99.75 89.5,98.5 90.5,98.5
DIR_M3: R34.1 STM32F407.1.44 | length 25.6
  Bottom Layer w1: STM32F407.1.44 151.636,96.644 153.356,96.644 155.75,94.25 155.75,88.175 162.425,81.5 R34.1
DIR_M4: R24.1 STM32F407.1.19 | length 31.6
  Bottom Layer w0.3: STM32F407.1.19 149,127.05 150.125,125.925 152.45,125.925 152.725,126.2 153.949,126.2 154.225,126.476 154.225,128.45 159.275,133.5 160.975,133.5
  Bottom Layer w1: 160.975,133.5 173.689,133.5 174.025,133.836 174.025,135.125 R24.1
DIR_MR: R9.1 STM32F407.1.10 | length 32.7
  Bottom Layer w1: STM32F407.1.10 155.17,139.92 162.38,147.13 162.38,163.38 161.735,164.025 160.2,164.025 R9.1
EN_M1: R17.1 STM32F407.2.15 | length 73.3
  Bottom Layer w1.2: R17.1 73.225,186.35 71.6,186.35 68.997,183.747 68.997,182.753 69,182.75 69,158.5 73,154.5 76.25,154.5 93.25,137.5 93.25,133.25 94.25,132.25 98.15,132.25 STM32F407.2.15
EN_M2: R27.1 STM32F407.2.41 | length 54.8
  Bottom Layer w1.2: R27.1 70.45,134.45 68.75,132.75 68.75,122.25 90.65,100.35 91.93,100.35 93,99.28 STM32F407.2.41
EN_M3: R36.1 STM32F407.1.38 | length 40.5
  Bottom Layer w1: STM32F407.1.38 151.636,104.264 153.786,104.264 161.55,96.5 176.75,96.5 181,92.25 R36.1
EN_M4: R26.1 STM32F407.1.22 | length 32.2
  Bottom Layer w1: STM32F407.1.22 151.636,124.776 152.851,124.776 153.25,125.175 155.15,125.175 155.15,127.65 159.5,132 175.75,132 176.775,133.025 R26.1
EN_MR: R7.1 STM32F407.1.12 | length 39.2
  Bottom Layer w1: STM32F407.1.12 154.63,137.38 164.3,147.05 164.3,164.275 162.15,166.425 160.175,166.425 R7.1
Encoder_1A: R43.1 STM32F407.2.21 | length 49.8
  Bottom Layer w1.2: R43.1 61.45,135.65 61.55,135.75 62.75,135.75 67.75,140.75 83.75,140.75 89,135.5 89,128.25 92.57,124.68 STM32F407.2.21
Encoder_1B: R41.1 STM32F407.2.20 | length 50.4
  Bottom Layer w0.3: 94.5,128.5 99.75,128.5 100.74,127.51 STM32F407.2.20
  Bottom Layer w1.2: R41.1 61.4,139.65 61.5,139.75 62.5,139.75 66,143.25 84.5,143.25 91.25,136.5 91.25,131.75 94.5,128.5
Encoder_2A: R49.1 STM32F407.2.44 | length 52.5
  Bottom Layer w0.3: 86.25,95.5 99.5,95.5 STM32F407.2.44
  Bottom Layer w1.2: R49.1 62.75,119 65,116.75 65,111.25 80.75,95.5 86.25,95.5
Encoder_2B: R48.1 STM32F407.2.43 | length 50.6
  Bottom Layer w1.2: R48.1@61.7,123.025 R48.1 62.25,123 67.5,117.75 67.5,112.325 82.075,97.75 87,97.75 88.01,96.74 STM32F407.2.43
Encoder_3A: R50.2 STM32F407.1.21 | length 58.8
  Bottom Layer w0.3: STM32F407.1.21 149.855,123.825 149.875,123.825 150.325,123.375 152.975,123.375 153.755,124.155 155.755,124.155 156.2,124.6 156.2,126.975 159.425,130.2 160.625,130.2
  Bottom Layer w1.2: 160.625,130.2 179.114,130.2 188,139.086 188,150.4 R50.2
Encoder_3B: R51.2 STM32F407.1.24 | length 53.3
  Bottom Layer w1.2: STM32F407.1.24 151.55,122.15 153.35,122.15 154.225,123.025 156.722,123.025 157.425,123.728 157.425,126.575 159.25,128.4 180.35,128.4 190.25,138.3 R51.2
Encoder_4A: R42.2 STM32F407.1.33 | length 65.7
  Bottom Layer w0.3: STM32F407.1.33 149,109.25 150.15,108.1 154.1,108.1 154.25,108.25
  Bottom Layer w1.2: 154.25,108.25 157.25,108.25 161.14,104.36 180.11,104.36 184,108.25 184,128.225 188.8,133.025 R42.2
Encoder_4B: R44.2 STM32F407.1.35 | length 64.2
  Bottom Layer w0.3: STM32F407.1.35 149.1,106.9 150.35,105.65 154.85,105.65 155,105.5
  Bottom Layer w1.2: 155,105.5 156.25,105.5 159.75,102 181,102 186.25,107.25 186.25,125.575 187.725,127.05 189.9,127.05 R44.2
F\A\U\L\T\: IC3.9 R52.2 | length 31.5
  Bottom Layer w0.3: 146.175,120.85 153.975,120.85 154.575,121.45 155.85,121.45
  Bottom Layer w0.6: IC3.9 144.52,120.345 145.025,120.85 146.175,120.85
  Bottom Layer w1: 155.85,121.45 158.225,121.45 159.125,122.35 R52.2
FLT_M1: IC3.20 R18.1 | length 86.8
  Top Layer w0.3: v1(92.5,141.75) 95.6,138.65 v2(103,138.65)
  Bottom Layer w0.6: v2(103,138.65) 103,124.05 104.3,122.75 107.14,122.75 109.545,120.345 IC3.20
  Bottom Layer w1.2: R18.1 73.7,172.025 73.675,172 73.675,160.575 v1(92.5,141.75)
FLT_M2: IC3.19 R28.1 | length 48.7
  Bottom Layer w0.3: 93.64,121.25 95.5,121.25 95.89,120.86 102.97,120.86
  Bottom Layer w0.6: 102.97,120.86 106.74,120.86 108.525,119.075 IC3.19
  Bottom Layer w1.2: R28.1 73.7,124 73.8,123.9 73.8,122.2 74.75,121.25 93.64,121.25
FLT_M3: IC3.10 R35.1 | length 69.3
  Top Layer w0.3: 145.75,95.5 155.97,95.5
  Top Layer w0.6: v2(140.675,119.055) 140.5,100.75 145.75,95.5 ; 155.97,95.5 156.72,94.75 v1(163.25,94.75)
  Bottom Layer w0.6: IC3.10 128.72,119.055 v2(140.675,119.055)
  Bottom Layer w1: v1(163.25,94.75) 174.275,94.75 176.05,92.975 R35.1@176.275,92.975
FLT_M4: IC3.8 R25.1 | length 63.8
  Bottom Layer w0.3: 146.55,133.575 152.875,133.575 159.3,140
  Bottom Layer w0.6: IC3.8 141.965,121.615 145.286,124.936 145.286,133.575 146.55,133.575
  Bottom Layer w1: 159.3,140 161.088,141.787 165.875,146.575 174.7,146.575 176.225,145.05 R25.1
FLT_MR: IC3.7 R8.1 | length 60.3
  Bottom Layer w0.6: IC3.7 141.157,122.885 143.725,125.453
  Bottom Layer w1: 143.725,125.453 143.725,161.939 147.836,166.05 149.55,166.05 R8.1
GND: "Kick Board.3" "Kick Board.5" "Kick Board.7" C1.2 C2.2 C3.2 C4.1 C5.2 D1.2 D2.2 IC2.4 IC3.12 IC3.27 J2.3 J2.5 J2.6 J3.1 J5.1 J7.1 J8.1 J10.2 J11.2 J12.2 J13.2 MOTOR1.9 MOTOR1.10 MOTOR2.9 MOTOR2.10 MOTOR3.9 MOTOR3.10 MOTOR4.9 MOTOR4.10 Q1.2 R2.1 R40.1 ROLLER.9 ROLLER.10 S1.1 S1.2 S1.3 S1.4 S1.5 STM32F407.1.1 STM32F407.1.2 STM32F407.1.28 STM32F407.1.46 STM32F407.1.49 STM32F407.1.50 STM32F407.2.1 STM32F407.2.2 STM32F407.2.49 STM32F407.2.50 | length 320.2
  Top Layer w4: 83,175.025 83,128.052 83,88.45 95.65,75.8 102.35,75.8 106.6,71.55 106.6,63.425 J3.1 138.225,63 146.625,71.4 146.625,77.975 150.075,81.425 167,81.425 167,106.175 174.675,113.85 174.675,130.2 169.163,135.713 ; 160.1,134.4 160.1,155.375
  Bottom Layer w0.4: v1(115,128.5) 115.735,129.235 IC3.27 ; C5.2 126.057,88.223 R40.1@126.057,86.631 ; R40.1 R40.1@126.057,86.631 ; R40.1@126.153,86.535 R40.1@126.057,86.631 ; IC3.12 130.965,116.535 132.5,115 v1(132.5,111.5)
  Bottom Layer w0.8: v1(143.725,180.325) 143.806,180.325 144.961,181.48 Q1.2
  Bottom Layer w1: v1(113.25,79.75) D1.2 D1.2@116.475,79.7 ; R2.1@121.85,76.45 J2.3 J2.6 125.25,67.834 J2.5
ID0: IC3.21 R16.2 S1.10 | length 126.6
  Top Layer w0.6: v2(133.75,136.1) v2(133.75,150.25)
  Top Layer w1.2: R16.2 170.8,178.999 171.47,179.669 S1.10
  Bottom Layer w0.6: IC3.21 110.135,121.615 106.75,125 106.75,133.05 109.8,136.1 v2(133.75,136.1) ; v2(133.75,150.25) 133.75,162.62 142.44,171.31 147.48,176.35 170.35,176.35 171.47,177.47 S1.10
ID1: IC3.22 R15.2 S1.9 | length 125.1
  Top Layer w0.6: v2(135.25,135) v2(135.25,150.25)
  Top Layer w1.2: R15.2 173.75,179.409 174.01,179.669 S1.9
  Bottom Layer w0.6: IC3.22 111.115,122.885 108.5,125.5 108.5,132.25 111.25,135 v2(135.25,135) ; v2(135.25,150.25) 135.25,162.5 138.484,165.734 138.484,165.76 139.079,166.356 139.106,166.356 148,175.25 172.25,175.25 174.01,177.01 S1.9
ID2: IC3.23 R14.2 S1.8 | length 125.5
  Top Layer w1.2: S1.8 176.587,179.713 176.587,176.362 R14.2
  Bottom Layer w0.6: IC3.23 111.845,124.155 110.25,125.75 110.25,131.75 112,133.5 138.16,133.5 139.5,134.84 139.5,165.339 148.411,174.25 152.5,174.25 175,174.25 176.55,175.8 S1.8
ID3: IC3.5 R13.2 S1.7 | length 100.9
  Top Layer w1.2: S1.7 179.09,179.669 179.4,179.359 R13.2
  Bottom Layer w0.6: IC3.5 138.85,125.425 140.75,127.325 140.75,165 149,173.25 176.75,173.25 179.09,175.59 S1.7
ID4: IC3.6 R12.2 S1.6 | length 104.5
  Top Layer w1.2: S1.6 181.63,179.669 182.125,179.174 R12.2
  Bottom Layer w0.6: IC3.6 140.155,124.155 142,126 142,164.75 149.5,172.25 178,172.25 181.63,175.88 S1.6
KickVCC: IC1.1 IC1.2 IC1.3 J1.1 J3.2 J8.2 | length 111.3
  Top Layer w2: J1.1 84.284,70.116 86.85,67.55 95.312,67.55 J3.2
  Top Layer w3: J3.2 J3.2@99.881,62.981
  Top Layer w5: J3.2 99.881,62.981 99.881,59.294 102.525,56.65 144.65,56.65 154.5,66.5 164.92,66.5 171.5,73.08 171.5,73.7
L_Kick: R46.2 STM32F407.1.25 | length 9.5
  Bottom Layer w0.3: STM32F407.1.25 150.275,118.325 153.85,118.325 154.25,117.925 154.25,117.225
  Bottom Layer w1: 154.25,117.225 154.25,116.05 155.85,116.05 R46.2
MotorOn: IC1.4
Mux_A: IC3.28 STM32F407.2.24 | length 24.8
  Top Layer w0.6: STM32F407.2.24 102.39,122.14 103,122.75 103,126 103.345,126.345 108.5,131.5 v2(116.5,131.5)
  Bottom Layer w0.6: v2(116.5,131.5) 117.495,130.505 IC3.28
Mux_B: IC3.2 STM32F407.1.23 | length 28.3
  Top Layer w0.6: v2(132.25,130.75) 145.25,130.75 146.75,129.25 146.75,122.812 147.422,122.14 STM32F407.1.23
  Bottom Layer w0.6: IC3.2 130.735,129.235 v2(132.25,130.75)
NetC5_1: C5.1 R38.1 R39.2 | length 4.8
  Bottom Layer w0.4: R38.1@123.512,86.66 R38.1@123.563,86.66 ; R38.1 123.637,88.143 123.717,88.223 C5.1
  Bottom Layer w0.6: R39.2 121.527,86.66 R38.1@123.512,86.66
NetD1_1: D1.1 J2.2 L1.1 | length 23.5
  Bottom Layer w1: J2.2 120.15,79.339 120.55,79.739 D1.1@120.95,79.739 ; L1.1@134.671,76.425 134.921,76.425 L1.1@134.796,76.55 ; L1.1 L1.1@135.175,77.95
  Bottom Layer w1.5: D1.1@120.95,79.739 133.386,79.739 L1.1@135.175,77.95
NetIC2_3: IC2.3 R39.1 | length 9.5
  Bottom Layer w0.6: R39.1 119.502,87.835 120.752,89.085 122.137,89.085 123.137,90.085 123.137,90.835 124.124,91.822 IC2.3
NetJ1_2: J1.2 J4.1 | length 30.2
  Bottom Layer w2: J4.1 72.364,83.675 85.65,83.675 90.051,79.274 J1.2
NetJ2_4: J2.4 R1.1 R2.2 | length 2.6
  Bottom Layer w1: J2.4 123.55,75.35
NetJ6_3: J6.3 R4.2 R5.2 | length 16.3
  Bottom Layer w1: R4.2 151.237,185.88 151.25,185.893 151.25,183.5 ; R5.2 151.25,182.38 151.25,183.5 ; J6.3 158.75,184 158.25,183.5 151.25,183.5
NetJ7_2: J7.2 R6.1 | length 3.5
  Top Layer w1: R6.1 J7.2
NetJ10_1: J10.1 R43.2 | length 4.6
  Bottom Layer w1.2: J10.1 R43.2
NetJ10_3: J10.3 R41.2 | length 4.5
  Bottom Layer w1.2: J10.3 R41.2
NetJ11_1: J11.1 R42.1 | length 3.4
  Bottom Layer w1.2: 191.45,133.05 J11.1
NetJ11_3: J11.3 R44.1 | length 4.9
  Bottom Layer w1.2: R44.1 J11.3
NetJ12_1: J12.1 R49.2 | length 4.9
  Bottom Layer w1.2: J12.1 R49.2
NetJ12_3: J12.3 R48.2 | length 4.9
  Bottom Layer w1.2: J12.3 R48.2
NetJ13_1: J13.1 R50.1 | length 4.6
  Bottom Layer w1.2: R50.1 J13.1
NetJ13_3: J13.3 R51.1 | length 4.3
  Bottom Layer w1.2: R51.1 190.278,146.421 194.546,146.421 J13.3
"NetKick Board_1": "Kick Board.1" Q2.3 | length 13.4
  Bottom Layer w1: 169.675,126.325 170,126 170.1,125.9 171.925,125.9 172.95,124.875 172.95,117.06 Q2.3
"NetKick Board_4": "Kick Board.4" Q4.3 | length 7.6
  Top Layer w1: 167.336,123.336 167.46,123.46 167.46,123.284
  Bottom Layer w1: Q4.3 166.25,117.56 166.25,121.25 167.336,122.336 167.336,123.336 167.46,123.46 167.46,123.284
"NetKick Board_6": "Kick Board.6" Q3.3 | length 7.9
  Bottom Layer w0.8: Q3.3 161.954,120.204 164.92,123.17 164.92,123.46
  Bottom Layer w1: 164.796,123.336 164.92,123.46
"NetKick Board_8": "Kick Board.8" R52.1 | length 3.4
  Bottom Layer w1: R52.1 161.414,124.25 162.204,123.46 162.38,123.46
NetMOTOR1_3: MOTOR1.3 R17.2 | length 1.9
  Bottom Layer w1.2: R17.2 73.35,184.55 73.45,184.45 73.45,183.083 MOTOR1.3
NetMOTOR1_4: MOTOR1.4 R18.2 | length 2.4
  Bottom Layer w1.2: R18.2 73.73,178.48 MOTOR1.4
NetMOTOR1_5: MOTOR1.5 R19.2 | length 1.8
  Bottom Layer w1.2: MOTOR1.5 75.73,184.455 R19.2
NetMOTOR1_7: MOTOR1.7 R20.2 | length 2
  Bottom Layer w1.2: MOTOR1.7 78,183.072 78,184.275 78.275,184.55 R20.2
NetMOTOR1_8: MOTOR1.8 R21.2 | length 2.4
  Bottom Layer w1.2: MOTOR1.8 77.73,178.55 77.83,178.45 R21.2
NetMOTOR2_3: MOTOR2.3 R27.2 | length 2.6
  Bottom Layer w1.2: R27.2 73.73,132.55 MOTOR2.3
NetMOTOR2_4: MOTOR2.4 R28.2 | length 2.4
  Bottom Layer w1.2: R28.2 73.73,125.955 MOTOR2.4
NetMOTOR2_5: MOTOR2.5 R29.2 | length 2.3
  Bottom Layer w1.2: MOTOR2.5 75.73,132.505 R29.2
NetMOTOR2_7: MOTOR2.7 R30.2 | length 2.4
  Bottom Layer w1.2: MOTOR2.7 77.73,132.18 78.1,132.55 R30.2
NetMOTOR2_8: MOTOR2.8 R31.2 | length 2.5
  Bottom Layer w1.2: R31.2 77.73,125.88 MOTOR2.8
NetMOTOR3_3: MOTOR3.3 R36.2 | length 6.7
  Bottom Layer w1: MOTOR3.3 176.275,86.692 176.275,85.5 177.525,84.25 R36.2@181.25,84.25
NetMOTOR3_4: MOTOR3.4 R35.2 | length 2.4
  Bottom Layer w1: MOTOR3.4 176.272,88.7 176.272,91.05 R35.2
NetMOTOR3_5: MOTOR3.5 R34.2 | length 7.6
  Bottom Layer w0.8: 169.775,81.725 174.231,86.181 MOTOR3.5@174.231,86.659
  Bottom Layer w1: R34.2 169.2,81.725 169.775,81.725 ; MOTOR3.5@174.231,86.659 MOTOR3.5
NetMOTOR3_7: MOTOR3.7 R33.2 | length 4.6
  Bottom Layer w0.8: 170.225,84.225 172.27,86.27 MOTOR3.7
  Bottom Layer w1: R33.2 169.2,84.225 170.225,84.225
NetMOTOR3_8: MOTOR3.8 R32.2 | length 2.4
  Bottom Layer w1: MOTOR3.8 R32.2
NetMOTOR4_3: MOTOR4.3 R26.2 | length 2.4
  Bottom Layer w1: MOTOR4.3 176.27,139.143 176.65,138.763 R26.2@176.65,137
NetMOTOR4_4: MOTOR4.4 R25.2 | length 2.1
  Bottom Layer w1: MOTOR4.4 176.308,141.236 176.308,143.15 R25.2
NetMOTOR4_5: MOTOR4.5 R24.2 | length 2.2
  Bottom Layer w1: R24.2@174.125,137.025 174.27,137.17 MOTOR4.5
NetMOTOR4_7: MOTOR4.7 R23.2 | length 2.3
  Bottom Layer w1: R23.2@171.8,137.05 172,137.25 172,138.874 172.27,139.143 MOTOR4.7
NetMOTOR4_8: MOTOR4.8 R22.2 | length 2.2
  Bottom Layer w1: R22.2 172.15,143.1 172.231,143.019 172.231,141.236 MOTOR4.8
NetQ1_1: Q1.1 R5.1 | length 2.2
  Bottom Layer w1: Q1.1 146.936,181.605 148.8,181.605 R5.1
NetQ2_1: Q2.1 R45.1 | length 5.8
  Bottom Layer w1: R45.1 165.9,112.475 167.225,112.475 168.8,114.05 Q2.1
NetQ3_1: Q3.1 R46.1 | length 1.9
  Bottom Layer w0.8: R46.1 R46.1@157.775,116.025
  Bottom Layer w1: R46.1 157.75,116.05 Q3.1
NetQ4_1: Q4.1 R47.1 | length 3.8
  Bottom Layer w0.8: R47.1 162.005,114.195 163.445,114.195 164.25,115 164.25,116.06 164.3,116.11 Q4.1
NetR7_2: R7.2 ROLLER.3 | length 2.6
  Bottom Layer w1: ROLLER.3 155.857,166.27 156.237,166.65 R7.2
NetR8_2: R8.2 ROLLER.4 | length 2.4
  Bottom Layer w1: R8.2 151.45,166.247 153.78,166.247 ROLLER.4
NetR9_2: R9.2 ROLLER.5 | length 2.5
  Bottom Layer w1: ROLLER.5 155.822,164.25 R9.2
NetR10_2: R10.2 ROLLER.7 | length 2.7
  Bottom Layer w1: ROLLER.7 155.857,162.27 156.275,161.851 158.275,161.851 R10.2
NetR11_2: R11.2 ROLLER.8 | length 2.5
  Bottom Layer w1: R11.2 151.35,162.26 153.793,162.26 ROLLER.8
NetR37_1: R37.1 R38.2 R40.2 | length 4.8
  Bottom Layer w0.8: R37.1 121.49,84.558 R38.2@123.56,84.558 ; R38.2@123.537,84.535 R38.2@123.56,84.558 ; R38.2 R38.2@123.624,84.623 ; R40.2 126.044,84.623 R38.2@123.624,84.623 ; R38.2@123.56,84.558 R38.2@123.624,84.623
P_VCC: IC1.5 IC1.6 IC1.7 IC1.8 MOTOR1.1 MOTOR1.2 MOTOR2.1 MOTOR2.2 MOTOR3.1 MOTOR3.2 MOTOR4.1 MOTOR4.2 ROLLER.1 ROLLER.2 | length 247.8
  Top Layer w4: 70.42,130.522 70.42,171.005 65,176.425 65,183.575 68.6,187.175 86.475,187.175 103.5,170.15 151.725,170.15
  Top Layer w6: 151.725,170.15 164.075,170.15 170.5,163.725 170.5,157 181.75,145.75 181.75,139.198 181.75,92.55
R_CE: J5.8 STM32F407.2.6 | length 25.1
  Bottom Layer w0.8: STM32F407.2.6 104.83,145 108.25,148.42 108.25,153.75 103.81,158.19 J5.8
R_Kick: R47.2 STM32F407.1.30 | length 8.7
  Bottom Layer w1: STM32F407.1.30 151.636,114.424 152.776,114.424 153.15,114.05 R47.2@160.05,114.05
R_Miso: J5.3 STM32F407.1.5 | length 58.9
  Top Layer w0.8: v2(137.75,145) STM32F407.1.5
  Bottom Layer w0.8: J5.3 101.327,164.057 101.327,165.077 103.5,167.25 108.25,167.25 130.5,145 v2(137.75,145)
R_Mosi: J5.7 STM32F407.1.7 | length 56
  Top Layer w0.8: v2(137.75,142.46) STM32F407.1.7
  Bottom Layer w0.8: J5.7 103.867,164.057 103.867,164.867 104.75,165.75 107,165.75 130.29,142.46 v2(137.75,142.46)
R_SCK: J5.9 STM32F407.1.9 | length 53.9
  Top Layer w0.8: v2(137.75,139.96) 148.96,139.96 STM32F407.1.9
  Bottom Layer w0.8: J5.9 105.137,163.943 106.281,163.943 130.264,139.96 v2(137.75,139.96)
R_SS: J5.10 STM32F407.1.11 | length 54.4
  Top Layer w0.8: v2(137.75,137.42) 148.96,137.42 STM32F407.1.11
  Bottom Layer w0.8: J5.10 130.39,137.42 v2(137.75,137.42)
Sensor_Bola: Q1.3 R3.2 STM32F407.1.4 | length 80
  Top Layer w0.3: 145.25,147.25 146.5,147.25 147.5,146.25 150.5,146.25 151.54,147.29 STM32F407.1.4
  Top Layer w1: v1(137.75,147.25) 145.25,147.25
  Bottom Layer w1: v1(137.75,147.25) 131.25,147.25 124.5,154 124.5,171.15 128.6,175.25 139.5,175.25 141.775,177.525 141.775,183.025 143.1,184.35 145.911,184.35 145.911,185.905 R3.2
Shoot_EN: Q2.2 Q3.2 Q4.2 STM32F407.1.26 | length 22.4
  Top Layer w1: v1(159.25,119.75) v1(164,119.75) v1(168,119.75)
  Bottom Layer w1: STM32F407.1.26 151.69,119.75 v1(159.25,119.75) 159.327,119.673 159.327,118.178 Q3.2 ; v1(164,119.75) 164.077,119.673 164.077,118.283 Q4.2 ; v1(168,119.75) 168,119.642 168.8,118.842 Q2.2
SP_M1: R21.1 STM32F407.2.13 | length 51.3
  Bottom Layer w1.2: R21.1 77.85,160.15 95.5,142.5 95.5,135.543 96.203,134.84 STM32F407.2.13
SP_M2: R31.1 STM32F407.2.39 | length 38.8
  Top Layer w1.2: v1(87,108.5) v1(87,124)
  Bottom Layer w1.2: R31.1 77.7,123.9 77.8,124 v1(87,124) ; v1(87,108.5) 93.68,101.82 STM32F407.2.39
SP_M3: R32.1 STM32F407.1.40 | length 25.3
  Bottom Layer w1: STM32F407.1.40 153.03,101.82 159,95.85 159,94.25 160.3,92.95 R32.1
SP_M4: R22.1 STM32F407.1.18 | length 26.9
  Bottom Layer w0.6: STM32F407.1.18 151.71,129.76 153.725,131.775 153.725,132.175 154.275,132.725
  Bottom Layer w1: 154.275,132.725 166.55,145 R22.1
SP_MR: R11.1 STM32F407.1.6 | length 28.4
  Bottom Layer w1: R11.1 149.45,158.3 152,155.75 157.164,155.75 157.75,155.164 157.75,147.6 155.15,145 153.25,145 STM32F407.1.6
pads on no net: IC2.5 IC2.6 IC2.7 IC3.3 IC3.4 IC3.13 IC3.14 IC3.24 IC3.25 IC3.26 J1.3 J5.4 J5.5 J5.6 J6.1 STM32F407.1.3 STM32F407.1.13 STM32F407.1.14 STM32F407.1.15 STM32F407.1.16 STM32F407.1.17 STM32F407.1.27 STM32F407.1.29 STM32F407.1.31 STM32F407.1.34 STM32F407.1.36 STM32F407.1.37 STM32F407.1.39 STM32F407.1.42 STM32F407.1.43 STM32F407.1.45 STM32F407.2.3 STM32F407.2.7 STM32F407.2.8 STM32F407.2.9 STM32F407.2.10 STM32F407.2.11 STM32F407.2.12 STM32F407.2.14 STM32F407.2.16 STM32F407.2.17 STM32F407.2.18 STM32F407.2.19 STM32F407.2.22 STM32F407.2.23 STM32F407.2.25 STM32F407.2.26 STM32F407.2.27 STM32F407.2.28 STM32F407.2.30 STM32F407.2.31 STM32F407.2.32 STM32F407.2.33 STM32F407.2.34 STM32F407.2.35
copper on no net:
  other v3: 153.1,75.78 179.1,75.78 180.6,159.28

## Polygon pours and split planes (outlines as drawn)
GND on Top Layer (solid, pour order 68): 171.25,87.75 169.787,87.75 169.25,88.287 169.25,90.5 168.276,91.474 166,91.474 165.25,90.724 165.25,86.25 163.25,84.25 163.75,83.75 171.138,83.75 171.25,83.862
GND on Top Layer (solid, pour order 64): 81.25,132.3 78.75,132.3 78.75,129.25 80.25,129.25 80.75,128.75 80.75,127.5 81.691,126.246 82.057,127.401
GND on Top Layer (solid, pour order 62): 80.75,174.25 80.75,173.75 82,172.5 84.351,172.5 84.351,176 80.75,176
GND on Top Layer (solid, pour order 60): 82.512,184.25 78.75,184.25 78.75,181.75 80.25,181.75 81,181 82,181
GND on Top Layer (solid, pour order 58): 168.5,133.5 168.5,134.125 171.25,136.875 171.25,140.25 169.663,140.25 169.163,140.75 161.75,140.75 161.75,134.25
5V on Top Layer "Top Layer-5V" (solid, pour order 54): 169.875,175.075 183.25,175.075 183.25,173.175 169.875,173.175
P_VCC on Top Layer "Top Layer-P_VCC 1" (solid, pour order 52): 68.425,132.3 72.75,132.3 72.75,127.25 72,126.5 68.425,126.5
P_VCC on Top Layer "Top Layer-P_VCC 2" (solid, pour order 50): 72.75,186 72.5,185.75 67.5,185.75 67.5,184 65,181.5 66,180.5 66,176 66.25,176 68.25,174 68.25,170.725 71.975,170.725 72.75,171.5
GND on Top Layer "Top Layer-GND" (solid, pour order 46): 85,174.25 85,183.275 84.025,184.25 80.75,184.25 80.75,174.25
GND on Top Layer "Top Layer-GND 1" (solid, pour order 44): 154.775,161.25 158.25,161.25 162.1,157.4 162.1,151.75 161.325,151.75 154.775,158.3
GND on Top Layer "Top Layer-GND 2" (solid, shelved, pour order 42): 171.25,140 166.25,145 161.25,145 161.25,136.15 163.9,133.5 171.25,133.5
GND on Top Layer "Top Layer-GND 3" (solid, pour order 40): 168.5,135.25 168.5,125 160.275,125 160.275,135.25